# Altium PCB atmega128rf_0v2.PcbDoc
Units mm, origin at the board's own origin, x right, y up, seen from the top; angles counter-clockwise.
Board outline 50 x 50 mm, 2 copper layers (Top Layer, Bottom Layer); 43 components, 69 nets, 272 pads, 190 vias.
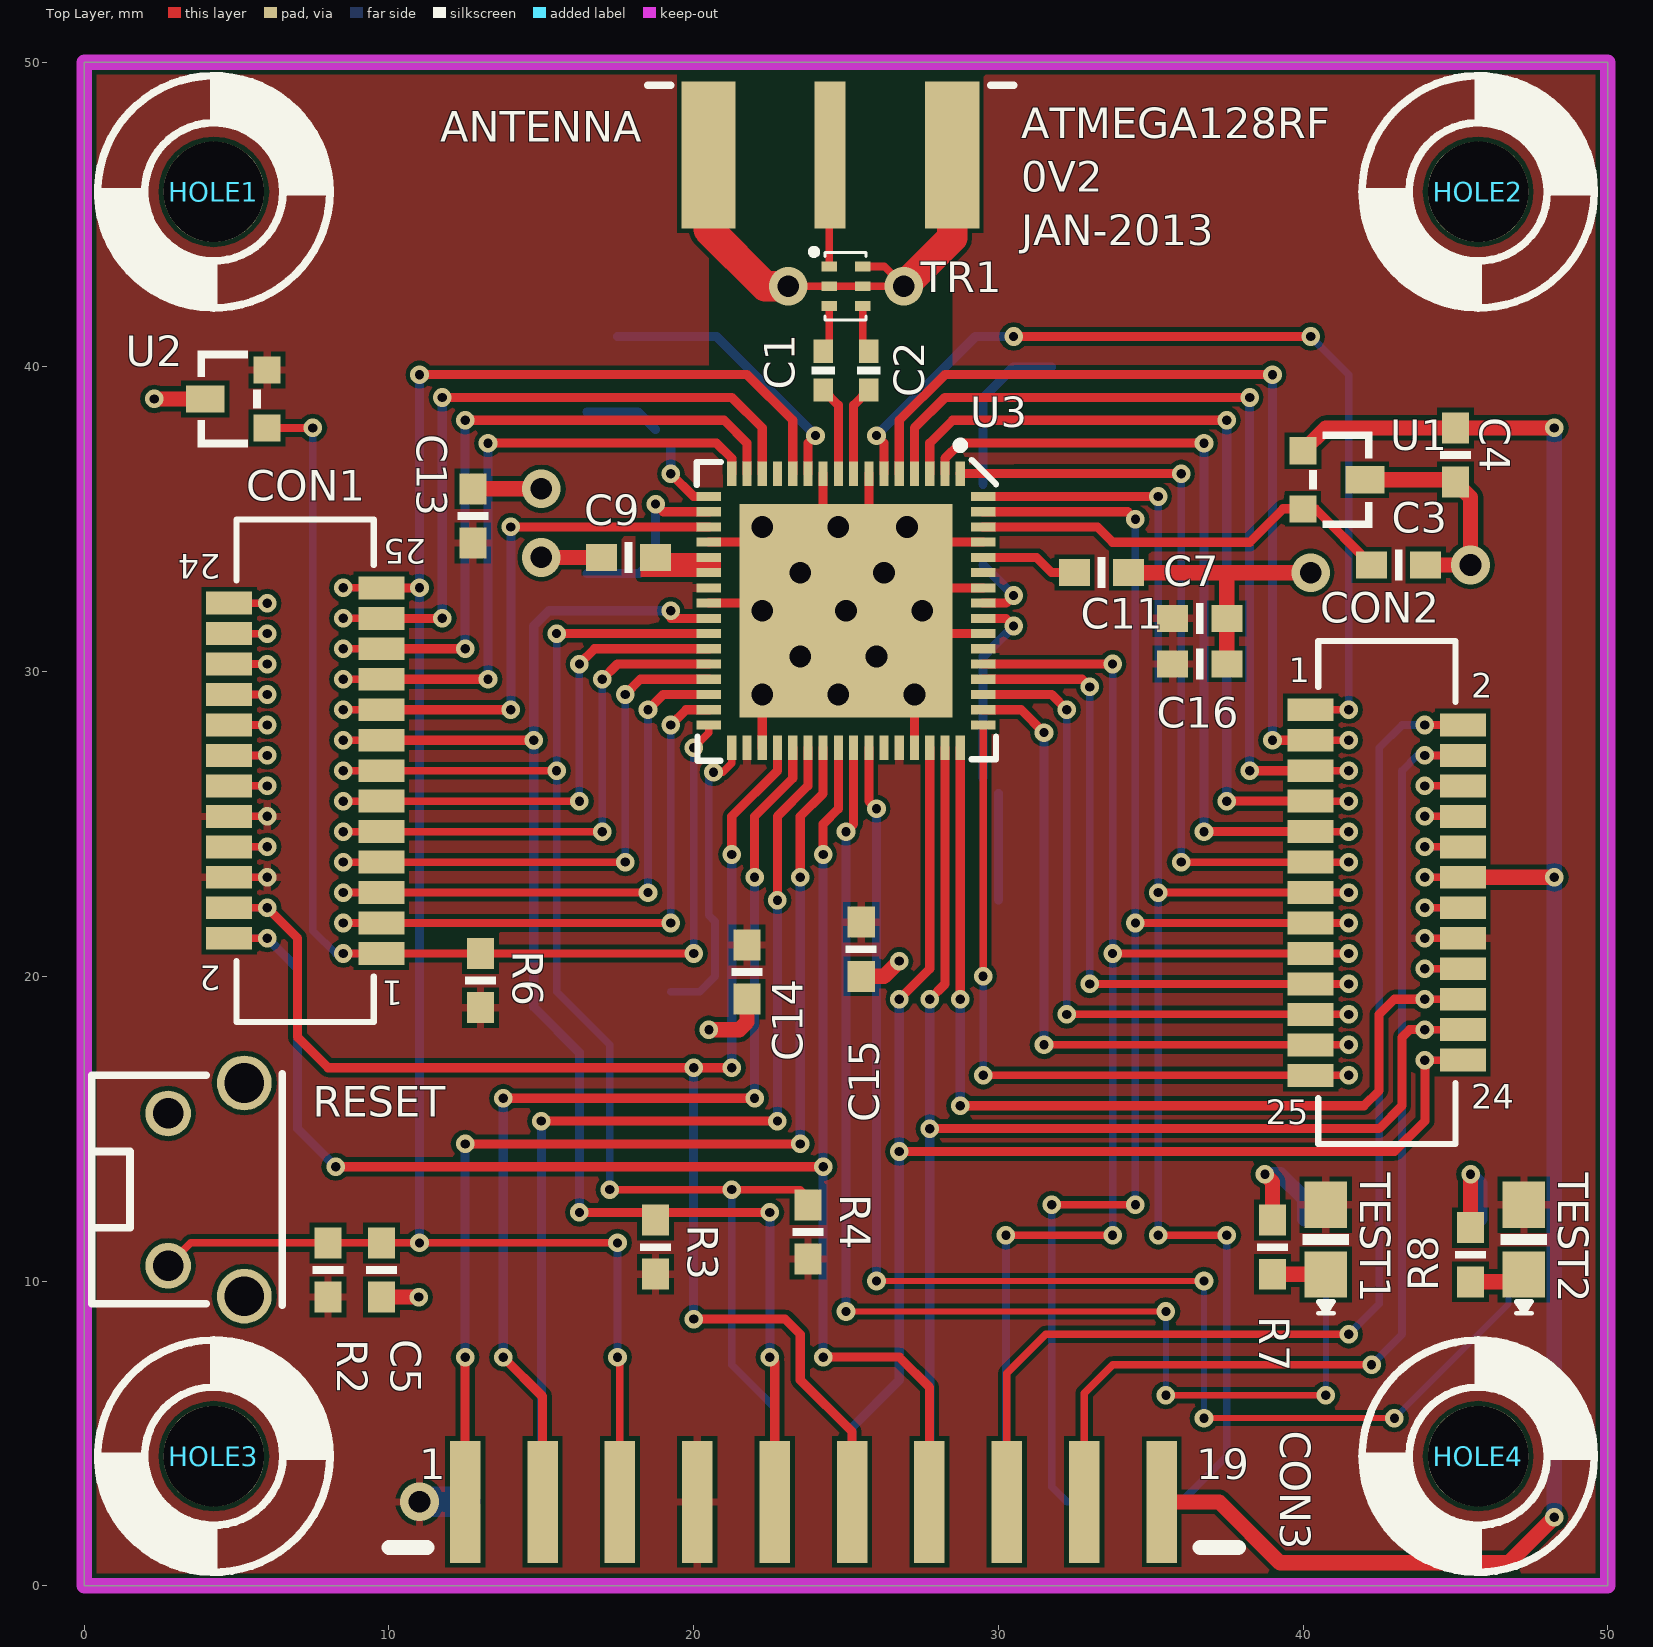
[diagram p0: Top Layer view]
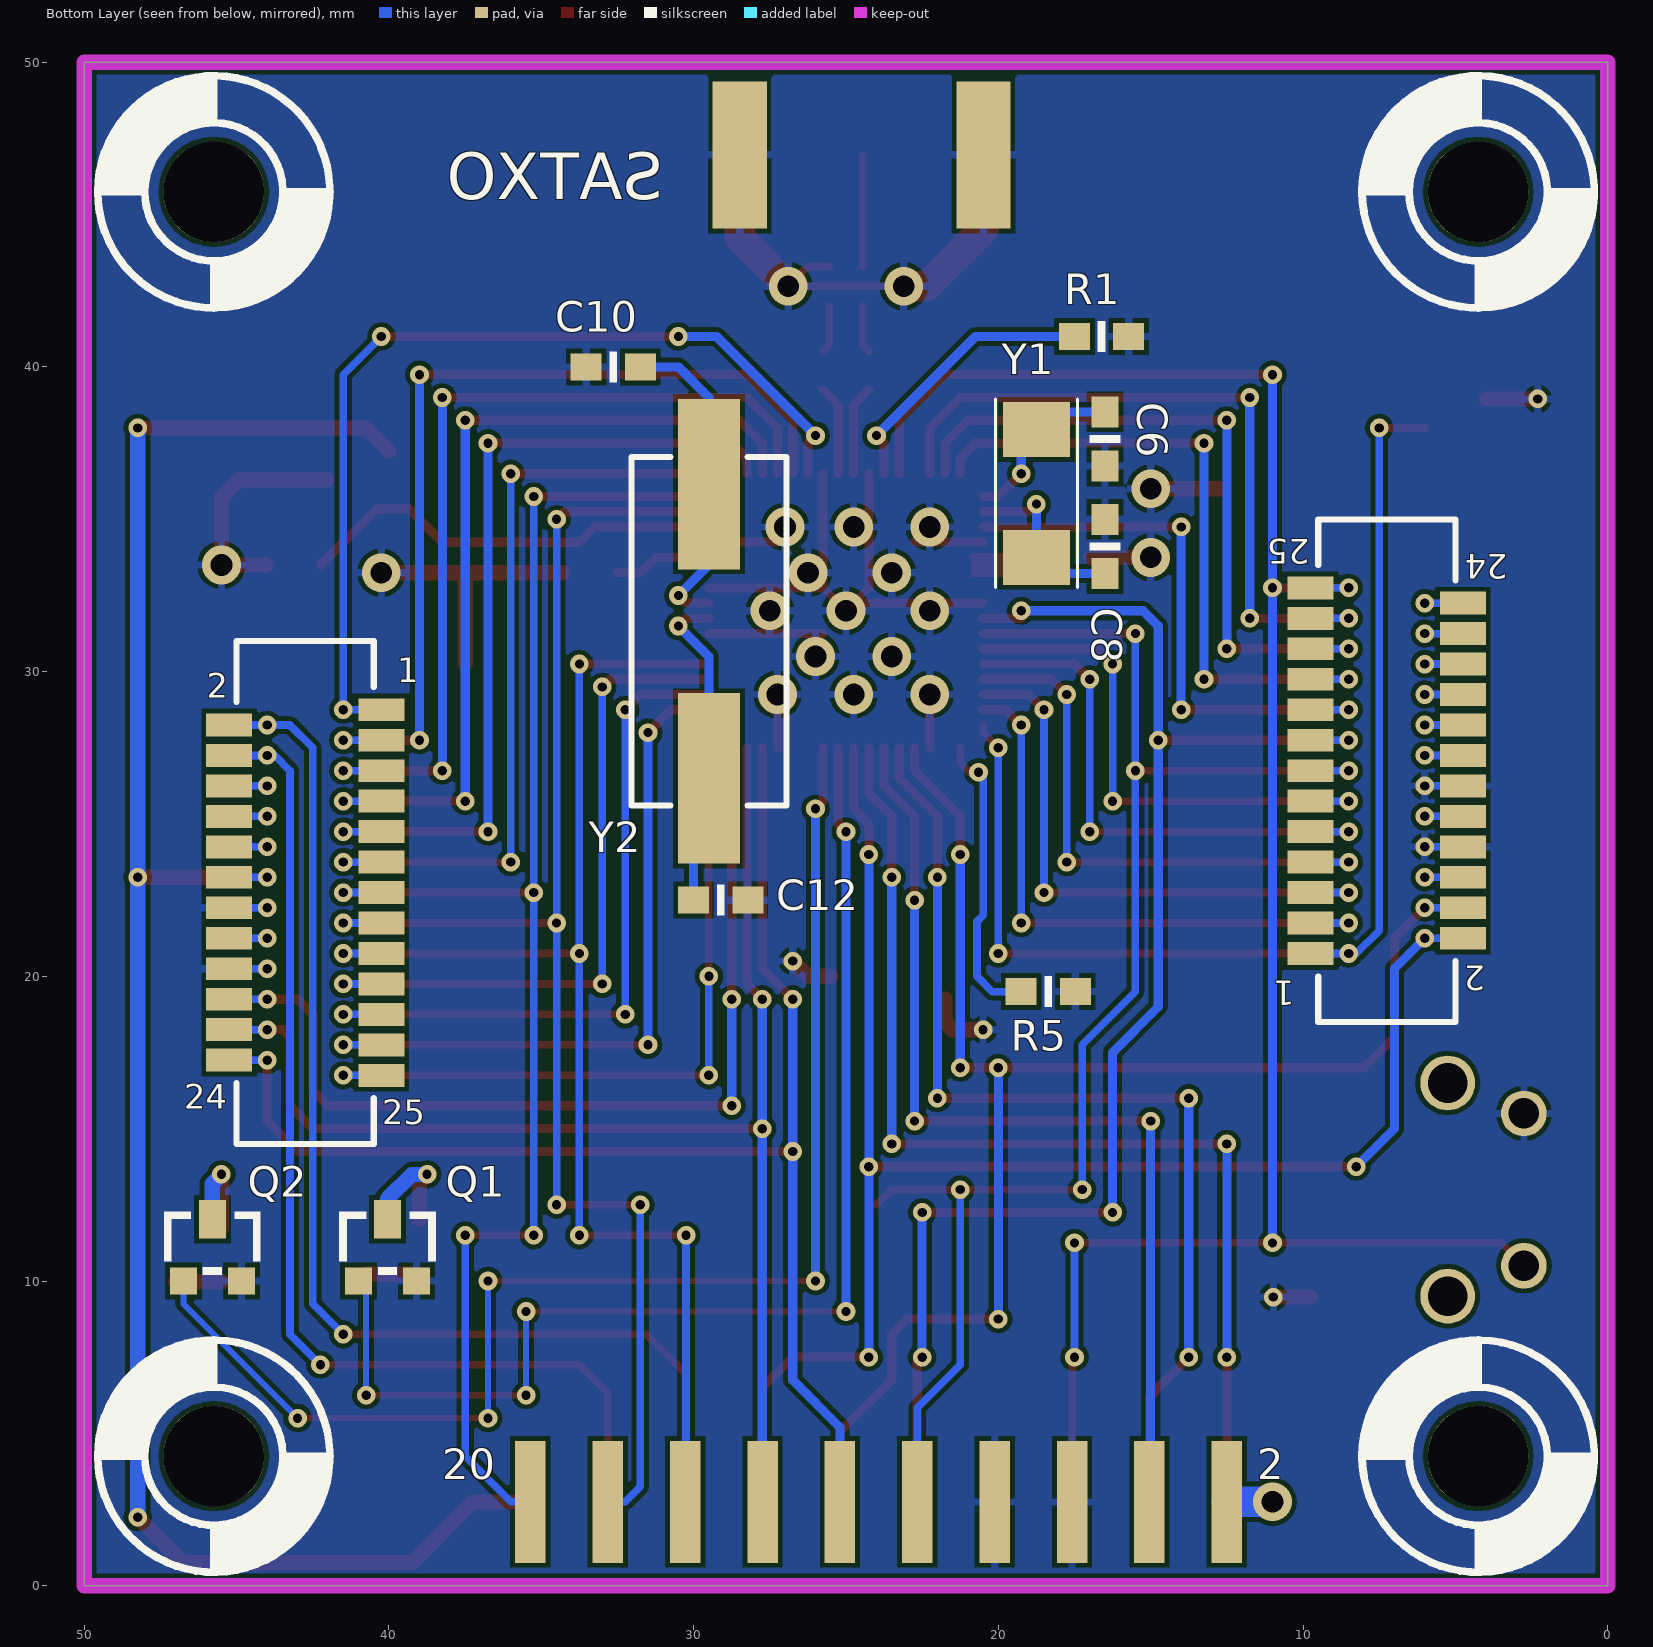
[diagram p1: Bottom Layer view, seen from below]

## Layer stack, top to bottom
Top Layer: signal copper 0.0356
Dielectric: dielectric 0.32, FR-4, Dk 4.8
Bottom Layer: signal copper 0.0356

## Board outline
0,0 50,0 50,50 0,50 0,0

## Design rules (kind name [scope] priority, off if disabled: settings)
Clearance [All] p1: gap=0.152
HoleSize [All] p1: absolutevalues=TRUE maxlimit=2.54 minlimit=0.305 maxpercent=80.000 minpercent=20.000
PolygonConnect [All] p1: connectstyle=Relief reliefconductorwidth=0.254 reliefentries=4 polygonreliefangle="90 Angle"
RoutingVias [All] p1: holewidth=0.508 width=0.762 viastyle="Through Hole" minholewidth=0.305 minwidth=0.61 maxholewidth=0.711 maxwidth=1.27
SilkscreenOverComponentPads [All] p1: minsilkscreentomaskgap=0.254
SolderMaskExpansion [All] p1: expansion=0.102
Width [All] p1: maxlimit=2.54 minlimit=0.152 preferedwidth=0.254
26 further rules are at their usual default settings.

## Components (designator, comment, footprint, x,y, rotation, side; value= is the part's Value field where it differs from the comment)
ANTENNA "SMA" SMA-JOHNSON-SCREW 29.25,49.5 r180 top
C1 "22pF" 0402 24.25,39.249 r90 top
C2 "22pF" 0402 25.75,39.249 r90 top
C3 "1uF" 0603 42.249,33.5 r0 top
C4 "1uF" 0603 45,38.001 r270 top
C5 "10nF" 0603 9.75,11.251 r270 top
C6 "12pF" 0603 16.5,36.749 r90 bottom
C7 "1uF" 0603 32.499,33.25 r0 top
C8 "12pF" 0603 16.5,35.001 r270 bottom
C9 "1uF" 0603 18.751,33.75 r180 top
C10 "18pF" 0603 31.75,39.999 r0 bottom
C11 "1uF" 0603 37.5,31.75 r180 top
C12 "18pF" 0603 30,22.5 r180 bottom
C13 "1uF" 0603 12.75,36 r270 top
C14 "1uF" 0603 21.75,19.25 r90 top
C15 "1uF" 0603 25.5,20 r90 top
C16 "1uF" 0603 37.5,30.25 r180 top
CON1 "25P" DF9-25-STACK#1 9.751,20.75 r180 top
CON2 "25P" DF9-25-STACK#2 40.249,28.75 r0 top
CON3 "20P" IDC-20-EDGE 12.5,2.75 r0 top
HOLE1 "HOLE" NPTH-3MM 4.25,45.75 r0 top
HOLE2 "HOLE" NPTH-3MM 45.75,45.75 r0 top
HOLE3 "HOLE" NPTH-3MM 4.25,4.25 r0 top
HOLE4 "HOLE" NPTH-3MM 45.75,4.25 r0 top
Q1 "BSS138" SOT-23@GSD 41,10 r180 bottom
Q2 "BSS138" SOT-23@GSD 46.75,10 r180 bottom
R1 "10K" 0603 17.501,41 r180 bottom
R2 "10K" 0603 8,11.251 r270 top
R3 "10k" 0603 18.75,12 r270 top
R4 "10k" 0603 23.75,12.5 r270 top
R5 "10K" 0603 19.25,19.5 r180 bottom
R6 "2.2k" 0603 13,20.75 r270 top
R7 "470R" 0603 39,12 r270 top
R8 "470R" 0603 45.5,11.75 r270 top
RESET "SW-SPST" MICROSWITCH-RA 2.75,13 r270 top
TEST1 "LED" 0805@DIODE 40.75,12.5 r270 top
TEST2 "LED" 0805@DIODE 47.25,12.5 r270 top
TR1 "2450FB15L0001E" 0805@BALUN 25.45,41.999 r90 top
U1 "REF3312" SOT-23 40,37.251 r270 top
U2 "DS2411" SOT-23 6,38 r90 top
U3 "ATmega128RFA1" QFN-64@EP 25,32 r270 top
Y1 "32.768kHz" XTAL-SMD-4.9x1.8 18.751,33.75 r90 bottom
Y2 "16MHz" HC49/4HSMX 29.5,26.5 r270 bottom

## Footprints (in the part's own frame and the unit in brackets; to place one, negate y for a bottom-side part, rotate by r counter-clockwise, add the part's x,y. Pads: shape width x height; smd on the part's side, far side on the other; paste and mask are expansions set on the pad)
0402 [mil]
  rect 30x25 smd: 1(0,0) 2(50,0)
  silkscreen extent 20,-15 30,15
0603 [mil]
  rect 40x35 smd: 1(0,0) 2(70,0)
  silkscreen extent 30,-20 40,20
0805@BALUN [mm]
  rect 0.32x0.5 smd: 1(1.3,1) 2(0.65,1) 3(0,1) 4(0,-0.1) 5(0.65,-0.1) 6(1.3,-0.1)
  silkscreen extent -0.46,-0.2 1.88,1.6
0805@DIODE [mil]
  rect 60x55 smd: A(0,0) K(90,0)
  silkscreen extent 38,-30 140,30
DF9-25-STACK#1 [mm] "Hirose DF9 25P CON - STACKED"
  rect 1.5x0.75 smd: 1(0,0) 2(5,-0.5) 3(0,-1) 4(5,-1.5) 5(0,-2) 6(5,-2.5) 7(0,-3) 8(5,-3.5) 9(0,-4) 10(5,-4.5) 11(0,-5) 12(5,-5.5) 13(0,-6) 14(5,-6.5) 15(0,-7) 16(5,-7.5) 17(0,-8) 18(5,-8.5) 19(0,-9) 20(5,-9.5) 21(0,-10) 22(5,-10.5) 23(0,-11) 24(5,-11.5) 25(0,-12)
  rect 1.5x0.75 smd far side: 1(0,0) 2(5,-0.5) 3(0,-1) 4(5,-1.5) 5(0,-2) 6(5,-2.5) 7(0,-3) 8(5,-3.5) 9(0,-4) 10(5,-4.5) 11(0,-5) 12(5,-5.5) 13(0,-6) 14(5,-6.5) 15(0,-7) 16(5,-7.5) 17(0,-8) 18(5,-8.5) 19(0,-9) 20(5,-9.5) 21(0,-10) 22(5,-10.5) 23(0,-11) 24(5,-11.5) 25(0,-12)
  Top Layer lines w0.25: 5,-0.5 3.75,-0.5 ; 5,-1.5 3.75,-1.5 ; 5,-2.5 3.75,-2.5 ; 5,-3.5 3.75,-3.5 ; 5,-4.5 3.75,-4.5 ; 5,-5.5 3.75,-5.5 ; 5,-6.5 3.75,-6.5 ; 5,-7.5 3.75,-7.5 ; 5,-8.5 3.75,-8.5 ; 5,-9.5 3.75,-9.5 ; 5,-10.5 3.75,-10.5 ; 5,-11.5 3.75,-11.5 ; 1.25,0 0,0 ; 1.25,-1 0,-1 ; 1.25,-2 0,-2 ; 1.25,-3 0,-3 ; 1.25,-4 0,-4 ; 1.25,-5 0,-5 ; 1.25,-6 0,-6 ; 1.25,-7 0,-7 ; 1.25,-8 0,-8 ; 1.25,-9 0,-9 ; 1.25,-10 0,-10 ; 1.25,-11 0,-11 ; 1.25,-12 0,-12
  Bottom Layer lines w0.25: 5,-0.5 3.751,-0.5 ; 5,-1.5 3.75,-1.5 ; 5,-2.5 3.75,-2.5 ; 5,-3.5 3.75,-3.5 ; 5,-4.5 3.75,-4.5 ; 5,-5.5 3.75,-5.5 ; 5,-6.5 3.75,-6.5 ; 5,-7.5 3.75,-7.5 ; 5,-8.5 3.75,-8.5 ; 5,-9.5 3.75,-9.5 ; 5,-10.5 3.75,-10.5 ; 5,-11.5 3.75,-11.5 ; 1.25,0 0,0 ; 1.25,-1 0,-1 ; 1.25,-2 0,-2 ; 1.25,-3 0,-3 ; 1.25,-4 0,-4 ; 1.25,-5 0,-5 ; 1.25,-6 0,-6 ; 1.25,-7 0,-7 ; 1.25,-8 0,-8 ; 1.25,-9 0,-9 ; 1.25,-10 0,-10 ; 1.25,-11 0,-11 ; 1.25,-12 0,-12 ; 3.751,-0.5 3.75,-0.5
  silkscreen extent 0.25,-14.25 4.75,2.25
DF9-25-STACK#2 [mm] "Hirose DF9 25P CON - STACKED"
  rect 1.5x0.75 smd: 1(0,0) 2(5,-0.5) 3(0,-1) 4(5,-1.5) 5(0,-2) 6(5,-2.5) 7(0,-3) 8(5,-3.5) 9(0,-4) 10(5,-4.5) 11(0,-5) 12(5,-5.5) 13(0,-6) 14(5,-6.5) 15(0,-7) 16(5,-7.5) 17(0,-8) 18(5,-8.5) 19(0,-9) 20(5,-9.5) 21(0,-10) 22(5,-10.5) 23(0,-11) 24(5,-11.5) 25(0,-12)
  rect 1.5x0.75 smd far side: 1(0,0) 2(5,-0.5) 3(0,-1) 4(5,-1.5) 5(0,-2) 6(5,-2.5) 7(0,-3) 8(5,-3.5) 9(0,-4) 10(5,-4.5) 11(0,-5) 12(5,-5.5) 13(0,-6) 14(5,-6.5) 15(0,-7) 16(5,-7.5) 17(0,-8) 18(5,-8.5) 19(0,-9) 20(5,-9.5) 21(0,-10) 22(5,-10.5) 23(0,-11) 24(5,-11.5) 25(0,-12)
  Top Layer lines w0.25: 0,-12 1.25,-12 ; 0,-11 1.25,-11 ; 0,-10 1.25,-10 ; 0,-9 1.25,-9 ; 0,-8 1.25,-8 ; 0,-7 1.25,-7 ; 0,-6 1.25,-6 ; 0,-5 1.25,-5 ; 0,-4 1.25,-4 ; 0,-3 1.25,-3 ; 0,-2 1.25,-2 ; 0,-1 1.25,-1 ; 0,0 1.25,0 ; 3.75,-11.5 5,-11.5 ; 3.75,-10.5 5,-10.5 ; 3.75,-9.5 5,-9.5 ; 3.75,-8.5 5,-8.5 ; 3.75,-7.5 5,-7.5 ; 3.75,-6.5 5,-6.5 ; 3.75,-5.5 5,-5.5 ; 3.75,-4.5 5,-4.5 ; 3.75,-3.5 5,-3.5 ; 3.75,-2.5 5,-2.5 ; 3.75,-1.5 5,-1.5 ; 3.75,-0.5 5,-0.5
  Bottom Layer lines w0.25: 0,-12 1.25,-12 ; 0,-11 1.25,-11 ; 0,-10 1.25,-10 ; 0,-9 1.25,-9 ; 0,-8 1.25,-8 ; 0,-7 1.25,-7 ; 0,-6 1.25,-6 ; 0,-5 1.25,-5 ; 0,-4 1.25,-4 ; 0,-3 1.25,-3 ; 0,-2 1.25,-2 ; 0,-1 1.25,-1 ; 0,0 1.25,0 ; 3.75,-11.5 5,-11.5 ; 3.75,-10.5 5,-10.5 ; 3.75,-9.5 5,-9.5 ; 3.75,-8.5 5,-8.5 ; 3.75,-7.5 5,-7.5 ; 3.75,-6.5 5,-6.5 ; 3.75,-5.5 5,-5.5 ; 3.75,-4.5 5,-4.5 ; 3.75,-3.5 5,-3.5 ; 3.75,-2.5 5,-2.5 ; 3.75,-1.5 5,-1.5 ; 3.75,-0.5 5,-0.5
  silkscreen extent 0.25,-14.25 4.75,2.25
HC49/4HSMX [mil]
  rect 220x80 smd: 1(0,0) 2(-380,0)
  silkscreen extent -415,-100 35,100
IDC-20-EDGE [mm] "IDC-20 STRAIGHT PCB EDGE"
  rect 1x4 smd: 1(0,0) 3(2.54,0) 5(5.08,0) 7(7.62,0) 9(10.16,0) 11(12.7,0) 13(15.24,0) 15(17.78,0) 17(20.32,0) 19(22.86,0)
  rect 1x4 smd far side: 2(0,0) 4(2.54,0) 6(5.08,0) 8(7.62,0) 10(10.16,0) 12(12.7,0) 14(15.24,0) 16(17.78,0) 18(20.32,0) 20(22.86,0)
  silkscreen extent -2.5,-1.5 25.37,-1.5
MICROSWITCH-RA [mm] "Right Angle Switch"
  round 1.5 hole 1: 1(-2.5,0) 2(2.5,0)
  round 1.8 hole 1.3: ""(-3.5,2.5) ""(3.5,2.5)
  silkscreen extent -3.8,-2.5 3.8,3.75
NPTH-3MM [mil]
  round 130 hole 130 unplated: 1(0,0)
  silkscreen extent -150,-150 150,150
QFN-64@EP [mm]
  rect 0.8x0.3 smd: 1(-4.5,3.75) 2(-4.5,3.25) 3(-4.5,2.75) 4(-4.5,2.25) 5(-4.5,1.75) 6(-4.5,1.25) 7(-4.5,0.75) 8(-4.5,0.25) 9(-4.5,-0.25) 10(-4.5,-0.75) 11(-4.5,-1.25) 12(-4.5,-1.75) 13(-4.5,-2.25) 14(-4.5,-2.75) 15(-4.5,-3.25) 16(-4.5,-3.75) 33(4.5,-3.75) 34(4.5,-3.25) 35(4.5,-2.75) 36(4.5,-2.25) 37(4.5,-1.75) 38(4.5,-1.25) 39(4.5,-0.75) 40(4.5,-0.25) 41(4.5,0.25) 42(4.5,0.75) 43(4.5,1.25) 44(4.5,1.75) 45(4.5,2.25) 46(4.5,2.75) 47(4.5,3.25) 48(4.5,3.75)
  rect 0.3x0.8 smd: 17(-3.75,-4.5) 18(-3.25,-4.5) 19(-2.75,-4.5) 20(-2.25,-4.5) 21(-1.75,-4.5) 22(-1.25,-4.5) 23(-0.75,-4.5) 24(-0.25,-4.5) 25(0.25,-4.5) 26(0.75,-4.5) 27(1.25,-4.5) 28(1.75,-4.5) 29(2.25,-4.5) 30(2.75,-4.5) 31(3.25,-4.5) 32(3.75,-4.5) 49(3.75,4.5) 50(3.25,4.5) 51(2.75,4.5) 52(2.25,4.5) 53(1.75,4.5) 54(1.25,4.5) 55(0.75,4.5) 56(0.25,4.5) 57(-0.25,4.5) 58(-0.75,4.5) 59(-1.25,4.5) 60(-1.75,4.5) 61(-2.25,4.5) 62(-2.75,4.5) 63(-3.25,4.5) 64(-3.75,4.5)
  rect 7x7 smd: PAD(0,0)
  silkscreen extent -5.55,-4.9 4.93,4.92
SMA-JOHNSON-SCREW [mil]
  rect 40x190 smd: 1(188,100)
  rect 70x190 smd: 2(30,100) 2(345,100)
  rect 70x190 smd far side: 2(30,100) 2(345,100)
  silkscreen extent -49,10 423,10
SOT-23 [mil]
  rect 35x35 smd: 1(0,0) 2(75,0)
  rect 35x50 smd: 3(37.5,80)
  silkscreen extent -25,8 100,90
SOT-23@GSD [mil] "SOT-23 (1-Gate , 2-Source, 3-Drain)"
  rect 35x50 smd: D(37.5,80)
  rect 35x35 smd: G(0,0) S(75,0)
  silkscreen extent -25,8 100,90
XTAL-SMD-4.9x1.8 [mm]
  rect 1.8x2.2 smd: 1(0,0) 2(4.2,0)
  silkscreen extent -0.99,-1.35 5.21,1.35

## Part data
ANTENNA: "SMA to PCB - Coaxial connector"
C1 C2 C3 C4 C5 C6 C7 C8 C9 C10 C11 C12 C13 C14 C15 C16: library part CAP, "Capacitor"
CON1 CON2: library part CON25, "Connector 25 Pins"
CON3: library part CON20, "Connector 20 Pins"
HOLE1 HOLE2 HOLE3 HOLE4: library part "PCB HOLE", "PCB Fixation Hole M3"
Q1 Q2: library part MOSFET-N, "N-Channel Logic Level Enhancement Mode Field Effect Transistor"
R1 R2 R3 R4 R5 R6 R7 R8: library part RES, "Resistor"
RESET: "Switch Push Button"
TEST1 TEST2: "Light emitting diode"
TR1: "FILTER BALUN ATMEL 2.45GHZ"
U1: "Voltage Reference 1.25V, 30ppm/degC, 5mA"
U2: "Silicon Serial Number"
U3: "802.15.4 compliant AVR transceiver"
Y1 Y2: library part "Crystal Oscillator", "Crystal Oscillator"

## Via types
v1: diameter 0.61, hole 0.305, Top Layer to Bottom Layer, 170 vias
v2: diameter 1.27, hole 0.711, Top Layer to Bottom Layer, 20 vias

## Nets (pads, with @x,y where several pads share a name; then routed paths per layer and width w, separated by ;. In a path a pad name is that pad's centre, name@x,y a point inside that pad or via, vN(x,y) a via of type N, cw(c..) or ccw(c..) an arc to the next point about the centre after c; other vN are vias at no path point)
1WIRE_SN: CON1.1 R6.1 U2.1 U3.32 | length 37.3
  Top Layer w0.25: U2.1 v1(7.5,38) ; CON1.1@9.751,20.75 v1(20,20.75) ; v1(20,27.5) 20.5,28 U3.32
  Bottom Layer w0.25: v1(7.5,38) 7.5,21.5 8.25,20.75 v1(8.501,20.75) ; v1(20,20.75) v1(20,27.5)
A3V3: C4.1 CON2.12 CON3.19 U1.1 | length 61.7
  Top Layer w0.5: CON3.19 37.25,2.75 39.25,0.75 46.75,0.75 v1(48.25,2.25) ; U1.1 40.749,38 v1(48.25,38) ; CON2.12@45.249,23.25 v1(48.25,23.25)
  Bottom Layer w0.5: v1(48.25,2.25) v1(48.25,23.25) v1(48.25,38)
  other v1: 43.999,23.25
AREF: C3.1 U1.2 U3.62 | length 14.2
  Top Layer w0.3: U3.62 33.25,34.75 33.75,34.25 38.25,34.25 39.346,35.346 U1.2 40.404,35.346 C3.1
D3V3: C11.2 C13.2 C14.2 C15.2 C16.2 CON1.6 CON1.10 CON2.16 CON3.2 CON3.7 R2.2 R3.2 R4.2 R6.2 TEST1.A TEST2.A U2.2 U3.23 U3.34 U3.44 U3.54 U3.59 | length 1.5
  Bottom Layer w1: v2(11,2.75) CON3.2
  other v1: 43.999,21.25 6.001,23.25 6.001,25.25
GND: ANTENNA.2 C3.2 C4.2 C5.2 C6.1 C7.2 C8.1 C9.2 C10.2 C11.1 C12.2 C13.1 C14.1 C15.1 C16.1 CON1.8 CON1.12 CON2.14 CON2.18 CON3.6 CON3.8 Q1.S Q2.S R1.2 R5.2 RESET.1 TR1.2 TR1.5 TR1.6 U1.3 U2.3 U3.7 U3.10 U3.20 U3.24 U3.35 U3.45 U3.55 U3.58 U3.61 U3.PAD | length 73
  Top Layer w0.25: v2(23.101,42.649) TR1.2 TR1.5 v2(26.899,42.649) 26.249,43.299 TR1.6 ; U3.PAD@24.25,32.75 24.75,32.25 U3.PAD U3.PAD@25.75,32.75
  Top Layer w0.3: U3.24 U3.PAD@24.75,32.25 ; U3.20 U3.PAD@22.75,34.25 ; U3.35 v2(22.25,29.25) ; U3.PAD@24.25,32.75 U3.10 ; U3.PAD@25.75,31.25 U3.55 ; U3.7 25.75,32.75 U3.58 ; U3.45 U3.PAD@27.25,29.75 ; U3.PAD@27.25,34.25 U3.61
  Top Layer w0.5: v1(2.298,38.952) U2.3 ; C5.2 v1(10.973,9.473) ; C13.1 v2(15,36) ; v2(15,33.75) C9.2 ; v1(20.5,18.25) 21.5,18.25 21.75,18.5 C14.1 ; C15.1 26.25,20 v1(26.75,20.5) ; C7.2 37.5,33.25 ; C16.1 37.5,33.25 ; v2(40.25,33.25) 37.5,33.25 ; U1.3 C4.2@44.924,36.298 ; C3.2 v2(45.5,33.5) 45.5,35.723 C4.2
  Top Layer w1: ANTENNA.2@20.487,46.96 20.487,44.513 22.351,42.649 v2(23.101,42.649) ; v2(26.899,42.649) 28.488,44.238 ANTENNA.2@28.488,46.96
  other v1: 43.999,20.25 43.999,22.25 6.001,24.25 6.001,26.25
  other v2: 24.75,29.25 27.25,29.25 23.5,30.5 26,30.5 22.25,32 25,32 27.5,32 23.5,33.25 26.25,33.25 22.25,34.75 24.75,34.75 27,34.75
LED1: Q1.G U3.41 | length 41
  Top Layer w0.2: v1(25,9) v1(35.5,9) ; v1(35.5,6.25) v1(40.75,6.25)
  Top Layer w0.3: v1(25,24.75) 25.25,25 U3.41
  Bottom Layer w0.2: v1(35.5,6.25) v1(35.5,9) ; v1(40.75,6.25) 40.75,9.75 Q1.G
  Bottom Layer w0.3: v1(25,9) v1(25,24.75)
LED2: Q2.G U3.42 | length 45.2
  Top Layer w0.2: v1(26,10) v1(36.75,10) ; v1(36.75,5.5) v1(43,5.5)
  Top Layer w0.3: U3.42 25.75,25.75 v1(26,25.5)
  Bottom Layer w0.2: v1(36.75,5.5) v1(36.75,10) ; v1(43,5.5) 46.75,9.25 Q2.G
  Bottom Layer w0.3: v1(26,10) v1(26,25.5)
MISO: CON3.1 U3.39 | length 36.1
  Top Layer w0.3: CON3.1 v1(12.5,7.5) ; v1(12.5,14.5) v1(23.5,14.5) ; v1(23.5,23.25) 23.5,25.25 24.25,26 U3.39
  Bottom Layer w0.3: v1(12.5,7.5) v1(12.5,14.5) ; v1(23.5,14.5) v1(23.5,23.25)
MOSI: CON3.4 U3.38 | length 32.9
  Top Layer w0.3: v1(15,15.25) v1(22.75,15.25) ; v1(22.75,22.5) 22.75,25.25 23.75,26.25 U3.38
  Bottom Layer w0.3: CON3.4@15,2.79 v1(15,15.25) ; v1(22.75,15.25) v1(22.75,22.5)
NetANTENNA_1: ANTENNA.1 TR1.1 | length 3.6
  Top Layer w0.25: TR1.1 ANTENNA.1@24.45,46.935
NetC1_1: C1.1 U3.9 | length 3
  Top Layer w0.3: C1.1 24.75,38.75 U3.9
NetC1_2: C1.2 TR1.3 | length 1.6
  Top Layer w0.25: C1.2 24.45,40.719 TR1.3
NetC2_1: C2.1 U3.8 | length 3
  Top Layer w0.3: U3.8 25.25,38.749 C2.1
NetC2_2: C2.2 TR1.4 | length 1.6
  Top Layer w0.25: TR1.4 25.55,40.72 C2.2
NetC6_2: C6.2 U3.17 Y1.2 | length 5
  Top Layer w0.3: v1(19.25,36.5) 20,35.75 U3.17
  Bottom Layer w0.3: C6.2 18.173,38.527 Y1.2 ; v1(19.25,36.5) Y1.2@19.25,37.45
NetC7_1: C7.1 U3.60 | length 3.2
  Top Layer w0.3: U3.60 31.25,33.75 31.75,33.25 C7.1
NetC8_2: C8.2 U3.18 Y1.1 | length 6.1
  Top Layer w0.3: v1(18.75,35.5) 19,35.25 U3.18
  Bottom Layer w0.3: C8.2 18.223,33.223 Y1.1 ; Y1.1@18.75,33.75 v1(18.75,35.5)
NetC9_1: C9.1 U3.21 U3.22
NetC10_1: C10.1 U3.57 Y2.2 | length 8
  Top Layer w0.3: U3.57 30.25,32.25 v1(30.5,32.5)
  Bottom Layer w0.3: Y2.2@29.5,33.5 v1(30.5,32.5) ; Y2.2 29.5,39 30.499,39.999 C10.1
NetC12_1: C12.1 U3.56 Y2.1 | length 10
  Top Layer w0.3: U3.56 30.25,31.75 v1(30.5,31.5)
  Bottom Layer w0.3: Y2.1 29.5,30.5 v1(30.5,31.5) ; C12.1 Y2.1@30,25.999
NetQ1_D: Q1.D R7.1 | length 3.9
  Top Layer w0.5: v1(38.75,13.5) 39,13.25 R7.1
  Bottom Layer w0.5: v1(38.75,13.5) 39.25,13.5 40.048,12.702 Q1.D
NetQ2_D: Q2.D R8.1 | length 3.3
  Top Layer w0.5: R8.1 v1(45.5,13.5)
  Bottom Layer w0.5: v1(45.5,13.5) 45.798,13.202 Q2.D
NetR1_1: R1.1 U3.11 | length 9.2
  Top Layer w0.3: U3.11 23.75,37.5 v1(24,37.75)
  Bottom Layer w0.3: R1.1 20.75,41 v1(24,37.75)
NetR5_1: R5.1 U3.33 | length 9.7
  Top Layer w0.25: v1(20.65,26.7) 20.95,26.7 21.25,27 U3.33
  Bottom Layer w0.25: R5.1 20.2,19.5 20.7,20 20.7,21.8 20.5,22 20.5,26.55 v1(20.65,26.7)
NetR7_2: R7.2 TEST1.K | length 1.8
  Top Layer w0.2: TEST1.K@40.742,10.222 TEST1.K
  Top Layer w0.5: R7.2 TEST1.K@40.742,10.222
NetR8_2: R8.2 TEST2.K | length 1.5
  Top Layer w0.5: R8.2 TEST2.K@47.008,9.972
PB0: CON1.4 CON3.11 U3.36 | length 48.6
  Top Layer w0.3: v1(6.001,22.25) 7,21.251 7,18 8,17 v1(20,17) v1(21.25,17) ; v1(20,8.75) 23,8.75 23.5,8.25 23.5,6.75 25.2,5.05 CON3.11 ; v1(21.25,24) 21.25,25.25 22.75,26.75 U3.36
  Bottom Layer w0.3: v1(20,8.75) v1(20,17) ; v1(21.25,17) v1(21.25,24)
PB4: CON1.2 CON3.13 U3.40 | length 52.3
  Top Layer w0.3: v1(8.25,13.75) v1(24.25,13.75) ; v1(24.25,7.5) 26.75,7.5 27.74,6.51 CON3.13 ; v1(24.25,24) 24.25,25 24.75,25.5 U3.40
  Bottom Layer w0.3: v1(6.001,21.25) 7,20.251 7,15 v1(8.25,13.75) ; v1(24.25,7.5) v1(24.25,13.75) v1(24.25,24)
PB7: U3.43
PD4: CON1.7 U3.29 | length 16.5
  Top Layer w0.25: CON1.7@9.751,23.75 v1(17.75,23.75)
  Top Layer w0.3: v1(17.75,29.25) 18.25,29.75 U3.29
  Bottom Layer w0.25: v1(17.75,23.75) v1(17.75,29.25)
  other v1: 8.501,23.75
PD5: CON1.5 U3.30 | length 17
  Top Layer w0.25: CON1.5@9.751,22.75 v1(18.5,22.75)
  Top Layer w0.3: v1(18.5,28.75) 19,29.25 U3.30
  Bottom Layer w0.25: v1(18.5,22.75) v1(18.5,28.75)
  other v1: 8.501,22.75
PD6: CON1.3 U3.31 | length 17.5
  Top Layer w0.25: CON1.3@9.751,21.75 v1@19.25,21.75
  Top Layer w0.3: v1(19.25,28.25) 19.75,28.75 U3.31
  Bottom Layer w0.25: v1(19.25,21.75) v1(19.25,28.25)
  other v1: 8.501,21.75
PE2: CON2.20 U3.48 | length 29.9
  Top Layer w0.3: v1(28.75,15.75) 42,15.75 42.5,16.25 42.5,18.75 43,19.25 v1(43.999,19.25) ; v1(28.75,19.25) U3.48
  Bottom Layer w0.3: v1(28.75,15.75) v1(28.75,19.25)
PE3: CON2.25 U3.49 | length 22.2
  Top Layer w0.25: v1(29.5,16.75) CON2.25@40.249,16.75 ; v1(29.5,20) U3.49
  Bottom Layer w0.25: v1@29.5,16.75 v1(29.5,20)
  other v1: 41.499,16.75
PE4: CON2.23 U3.50 | length 21.3
  Top Layer w0.25: v1(31.5,17.75) CON2.23@40.249,17.75
  Top Layer w0.3: U3.50 30.75,28.75 v1(31.5,28)
  Bottom Layer w0.3: v1(31.5,17.75) v1(31.5,28)
  other v1: 41.499,17.75
PE5: CON2.21 U3.51 | length 21
  Top Layer w0.25: v1(32.25,18.75) CON2.21@40.249,18.75
  Top Layer w0.3: U3.51 31.75,29.25 v1(32.25,28.75)
  Bottom Layer w0.25: v1(32.25,18.75) v1(32.25,28.75)
  other v1: 41.499,18.75
PE6: CON2.19 U3.52 | length 20.6
  Top Layer w0.25: v1(33,19.75) CON2.19@40.249,19.75
  Top Layer w0.3: U3.52 32.75,29.75 v1(33,29.5)
  Bottom Layer w0.25: v1(33,19.75) v1(33,29.5)
  other v1: 41.499,19.75
PE7: CON2.17 CON3.16 U3.53 | length 41.7
  Top Layer w0.25: v1(30.25,11.5) v1(33.75,11.5) ; v1(33.75,20.75) CON2.17@40.249,20.75
  Top Layer w0.3: U3.53 v1(33.75,30.25)
  Bottom Layer w0.25: CON3.16@30.25,2.78 v1(30.25,11.5) ; v1(33.75,11.5) v1(33.75,20.75) v1@33.75,30.25
  other v1: 41.499,20.75
PF0: CON2.15 CON3.18 U3.63 | length 46.6
  Top Layer w0.25: v1(31.75,12.5) v1(34.5,12.5) ; v1(34.5,21.75) CON2.15@40.249,21.75
  Top Layer w0.3: U3.63 34.25,35.25 v1(34.5,35)
  Bottom Layer w0.25: v1(31.75,12.5) 31.75,3.25 32.25,2.75 CON3.18 ; v1(34.5,12.5) v1(34.5,21.75) v1@34.5,35
  other v1: 41.499,21.75
PF1: CON2.13 CON3.20 U3.64 | length 47.3
  Top Layer w0.25: v1(35.25,11.5) v1(37.5,11.5) ; v1(35.25,22.75) CON2.13@40.249,22.75
  Top Layer w0.3: U3.64 v1(35.25,35.75)
  Bottom Layer w0.25: v1(35.25,11.5) v1(35.25,22.75) v1(35.25,35.75) ; CON3.20 36,2.75 37.5,4.25 v1(37.5,11.5)
  other v1: 41.499,22.75
PF2: CON2.11 U3.1 | length 24.2
  Top Layer w0.25: v1(36,23.75) CON2.11@40.249,23.75
  Top Layer w0.3: U3.1 30.5,36.5 ; 30.5,36.5 v1(36,36.5)
  Bottom Layer w0.25: v1(36,23.75) v1(36,36.5)
  other v1: 41.499,23.75
PF3: CON2.9 U3.2 | length 25.5
  Top Layer w0.3: U3.2 28.25,37 28.75,37.5 30.5,37.5 v1(36.75,37.5) ; v1(36.75,24.75) CON2.9@40.249,24.75
  Bottom Layer w0.3: v1(36.75,24.75) v1(36.75,37.5)
  other v1: 41.499,24.75
PF4: CON2.7 U3.3 | length 26.3
  Top Layer w0.3: U3.3 27.75,37.5 28.5,38.25 30.5,38.25 v1(37.5,38.25) ; v1@37.5,25.75 CON2.7@40.249,25.75
  Bottom Layer w0.3: v1(37.499,25.75) v1@37.499,38.249
  other v1: 41.499,25.75
PF5: CON2.5 U3.4 | length 27.2
  Top Layer w0.3: U3.4 27.25,38 28.25,39 v1(38.25,39) ; v1@38.25,26.75 CON2.5@40.249,26.75
  Bottom Layer w0.3: v1(38.249,26.75) v1(38.25,39)
  other v1: 41.499,26.75
PF6: CON2.3 U3.5 | length 27.9
  Top Layer w0.3: U3.5 26.75,38.25 28.25,39.75 30.5,39.75 v1(39,39.75) ; v1(38.999,27.75) CON2.3@40.249,27.75
  Bottom Layer w0.3: v1(38.999,27.75) v1@38.999,39.749
  other v1: 41.499,27.75
PF7: CON2.1 U3.6 | length 29.7
  Top Layer w0.3: v1(26,37.75) 26.25,37.5 U3.6 ; v1(30.5,41) v1(40.25,41)
  Bottom Layer w0.25: v1(40.25,41) 41.499,39.751 v1(41.499,28.75)
  Bottom Layer w0.3: v1(26,37.75) 29.25,41 v1(30.5,41)
PG0: CON1.23 U3.14 | length 21.7
  Top Layer w0.3: CON1.23@9.751,31.75 v1(11.75,31.75) ; v1(11.75,39) 21.25,39 22.25,38 U3.14
  Bottom Layer w0.3: v1(11.75,31.75) v1(11.75,39)
  other v1: 8.501,31.75
PG1: CON1.21 U3.15 | length 20.8
  Top Layer w0.3: CON1.21@9.751,30.75 v1(12.5,30.75) ; v1(12.5,38.25) 21,38.25 21.75,37.5 U3.15
  Bottom Layer w0.3: v1(12.5,30.75) v1(12.5,38.25)
  other v1: 8.501,30.75
PG2: CON1.19 U3.16 | length 20
  Top Layer w0.3: CON1.19@9.751,29.75 v1(13.25,29.75) ; v1(13.25,37.5) 20.75,37.5 21.25,37 U3.16
  Bottom Layer w0.3: v1(13.25,29.75) v1(13.25,37.5)
  other v1: 8.501,29.75
PG5: CON1.17 U3.19 | length 16.7
  Top Layer w0.3: CON1.17@9.751,28.75 v1(14,28.75) ; v1(14,34.75) U3.19
  Bottom Layer w0.3: v1(14,28.75) v1(14,34.75)
  other v1: 8.501,28.75
RSTZ: C5.1 CON1.25 CON3.5 R2.1 RESET.2 U3.12 | length 67.9
  Top Layer w0.25: RESET.2 3.5,11.25 v1(17.5,11.25) ; CON3.5 v1@17.58,7.42
  Top Layer w0.3: CON1.25@9.751,32.75 v1(11,32.75) ; v1(11,39.75) 21.75,39.75 23.25,38.25 U3.12
  Bottom Layer w0.25: v1(17.5,7.5) v1(17.5,11.25)
  Bottom Layer w0.3: v1(11,11.25) v1(11,32.75) v1(11,39.75)
  other v1: 8.501,32.75
SCK: CON3.3 U3.37 | length 34.1
  Top Layer w0.3: v1(13.75,7.5) 15.04,6.21 CON3.3 ; v1(13.75,16) v1(22,16) ; v1(22,23.25) 22,25.25 23.25,26.5 U3.37
  Bottom Layer w0.3: v1(13.75,7.5) v1(13.75,16) ; v1(22,16) v1(22,23.25)
SCL: CON1.15 CON3.9 R3.1 U3.25 | length 46.6
  Top Layer w0.3: CON1.15@9.751,27.75 v1(14.75,27.75) ; v1(16.25,12.25) v1(22.5,12.25) ; v1@19.25,31.75 U3.25 ; v1(22.5,7.5) 22.66,7.34 CON3.9
  Bottom Layer w0.3: v1(16.25,12.25) 16.25,17.5 14.75,19 v1(14.75,27.75) 14.75,31.5 15.25,32 v1(19.25,32) ; v1(22.5,7.5) v1(22.5,12.25)
  other v1: 8.501,27.75
SDA: CON1.13 CON3.10 R4.1 U3.26 | length 47.5
  Top Layer w0.25: CON1.13@9.751,26.75 v1(15.5,26.75) ; v1(17.25,13) v1(21.25,13) 23.5,13 R4.1@24,12.5
  Top Layer w0.3: v1(15.5,31.25) U3.26
  Bottom Layer w0.25: v1(15.5,26.75) 15.5,19.5 17.25,17.75 v1(17.25,13) ; v1(15.5,26.75) v1(15.5,31.25) ; v1(21.25,13) 21.25,7.25 22.66,5.84 CON3.10
  other v1: 8.501,26.75
STACK_BUS1: CON1.14
  other v1: 6.001,27.25
STACK_BUS2: CON1.16
  other v1: 6.001,28.25
STACK_BUS3: CON1.18
  other v1: 6.001,29.25
STACK_BUS4: CON1.20
  other v1: 6.001,30.25
STACK_BUS5: CON1.22
  other v1: 6.001,31.25
STACK_BUS6: CON1.24
  other v1: 6.001,32.25
STACK_BUS7: CON2.2 CON3.15 | length 37.4
  Top Layer w0.25: CON3.15 30.28,6.97 31.56,8.25 v1(41.5,8.25)
  Bottom Layer w0.25: v1(41.5,8.25) 42.5,9.25 42.5,27.5 43.25,28.25 v1(43.999,28.25)
STACK_BUS8: CON2.4 CON3.17 | length 34.3
  Top Layer w0.25: CON3.17 32.82,6.32 33.75,7.25 v1(42.25,7.25)
  Bottom Layer w0.25: v1(42.25,7.25) 43.25,8.25 43.25,26.75 43.75,27.25 v1(43.999,27.25)
STACK_BUS9: CON2.6
  other v1: 43.999,26.25
STACK_BUS10: CON2.8
  other v1: 43.999,25.25
STACK_BUS11: CON2.10
  other v1: 43.999,24.25
UART0_RX: CON2.24 CON3.12 U3.46 | length 45.5
  Top Layer w0.3: v1(26.75,14.25) 43,14.25 43.999,15.249 v1(43.999,17.25) ; v1(26.75,19.25) 27.75,20.25 U3.46
  Bottom Layer w0.3: CON3.12 25.2,5.2 26.75,6.75 v1(26.75,14.25) v1(26.75,19.25)
UART0_TX: CON2.22 CON3.14 U3.47 | length 43.9
  Top Layer w0.3: v1(27.75,15) 42.5,15 43.25,15.75 43.25,18 43.5,18.25 v1(43.999,18.25) ; v1(27.75,19.25) 28.25,19.75 U3.47
  Bottom Layer w0.3: CON3.14@27.75,2.76 v1(27.75,15) v1(27.75,19.25)
UART1_RX: CON1.11 U3.27 | length 15.5
  Top Layer w0.25: CON1.11@9.751,25.75 v1(16.25,25.75)
  Top Layer w0.3: v1(16.25,30.25) 16.75,30.75 U3.27
  Bottom Layer w0.25: v1(16.25,25.75) v1(16.25,30.25)
  other v1: 8.501,25.75
UART1_TX: CON1.9 U3.28 | length 16
  Top Layer w0.25: CON1.9@9.751,24.75 v1(17,24.75)
  Top Layer w0.3: v1(17,29.75) 17.5,30.25 U3.28
  Bottom Layer w0.25: v1(17,24.75) v1(17,29.75)
  other v1: 8.501,24.75
pads on no net: HOLE1.1 HOLE2.1 HOLE3.1 HOLE4.1 RESET. U3.13

## Polygon pours and split planes (outlines as drawn)
GND on Bottom Layer "GND" (solid, pour order 10): 0,0 0,50 50,50 50,0 0,0
D3V3 on Top Layer "D3V3" (solid, pour order 14): 0,0 0,50 20.5,50 20.5,37.5 28.25,37.5 28.5,37.75 28.5,50 50,50 50,0 0,0

## Keep-outs
Keep-Out Layer:
  lines w0.5: 0,0 0,25 0,50 50,50 50,0 25,0 0,0

## Other copper
Top Layer:
  rectangle net NetC9_1: 18.25,33.1 20.9,33.9

## Silkscreen, mask and mechanical layers (free items; w line width, h text height)
Top Overlay:
  text "ATMEGA128RF" at 30.75,47.5 h1
  text "0V2" at 30.75,45.75 h1
  text "JAN-2013" at 30.75,44 h1
Bottom Overlay:
  text "SATXO" at 31,45.5 h1.52

## Text inside footprints (layer, text, board x,y; h text height)
CON1: Top Overlay "25" at 11.226,34.35 h0.8 r180; Top Overlay "24" at 4.476,33.85 h0.8 r180; Top Overlay "2" at 4.476,20.35 h0.8 r180; Top Overlay "1" at 10.476,19.85 h0.8 r180; Bottom Overlay "1" at 10.276,19.85 h0.8 r180; Bottom Overlay "2" at 4.026,20.35 h0.8 r180; Bottom Overlay "25" at 9.776,34.35 h0.8 r180; Bottom Overlay "24" at 3.276,33.85 h0.8 r180
CON2: Top Overlay "25" at 38.774,15.15 h0.8; Top Overlay "24" at 45.524,15.65 h0.8; Top Overlay "2" at 45.524,29.15 h0.8; Top Overlay "1" at 39.524,29.65 h0.8; Bottom Overlay "1" at 39.724,29.65 h0.8; Bottom Overlay "2" at 45.974,29.15 h0.8; Bottom Overlay "25" at 40.224,15.15 h0.8; Bottom Overlay "24" at 46.724,15.65 h0.8
CON3: Top Overlay "1" at 11,3.5 h1; Top Overlay "19" at 36.5,3.5 h1; Bottom Overlay "20" at 38.25,3.5 h1; Bottom Overlay "2" at 11.5,3.5 h1